# Altium PCB PCB1.PcbDoc
Units mm, origin at the board's own origin, x right, y up, seen from the top; angles counter-clockwise.
Board outline 58.29 x 42.93 mm, 2 copper layers (Top Layer, Bottom Layer); 28 components, 25 nets, 118 pads, 19 vias.
Unrouted connection lines stored in the file: 1.
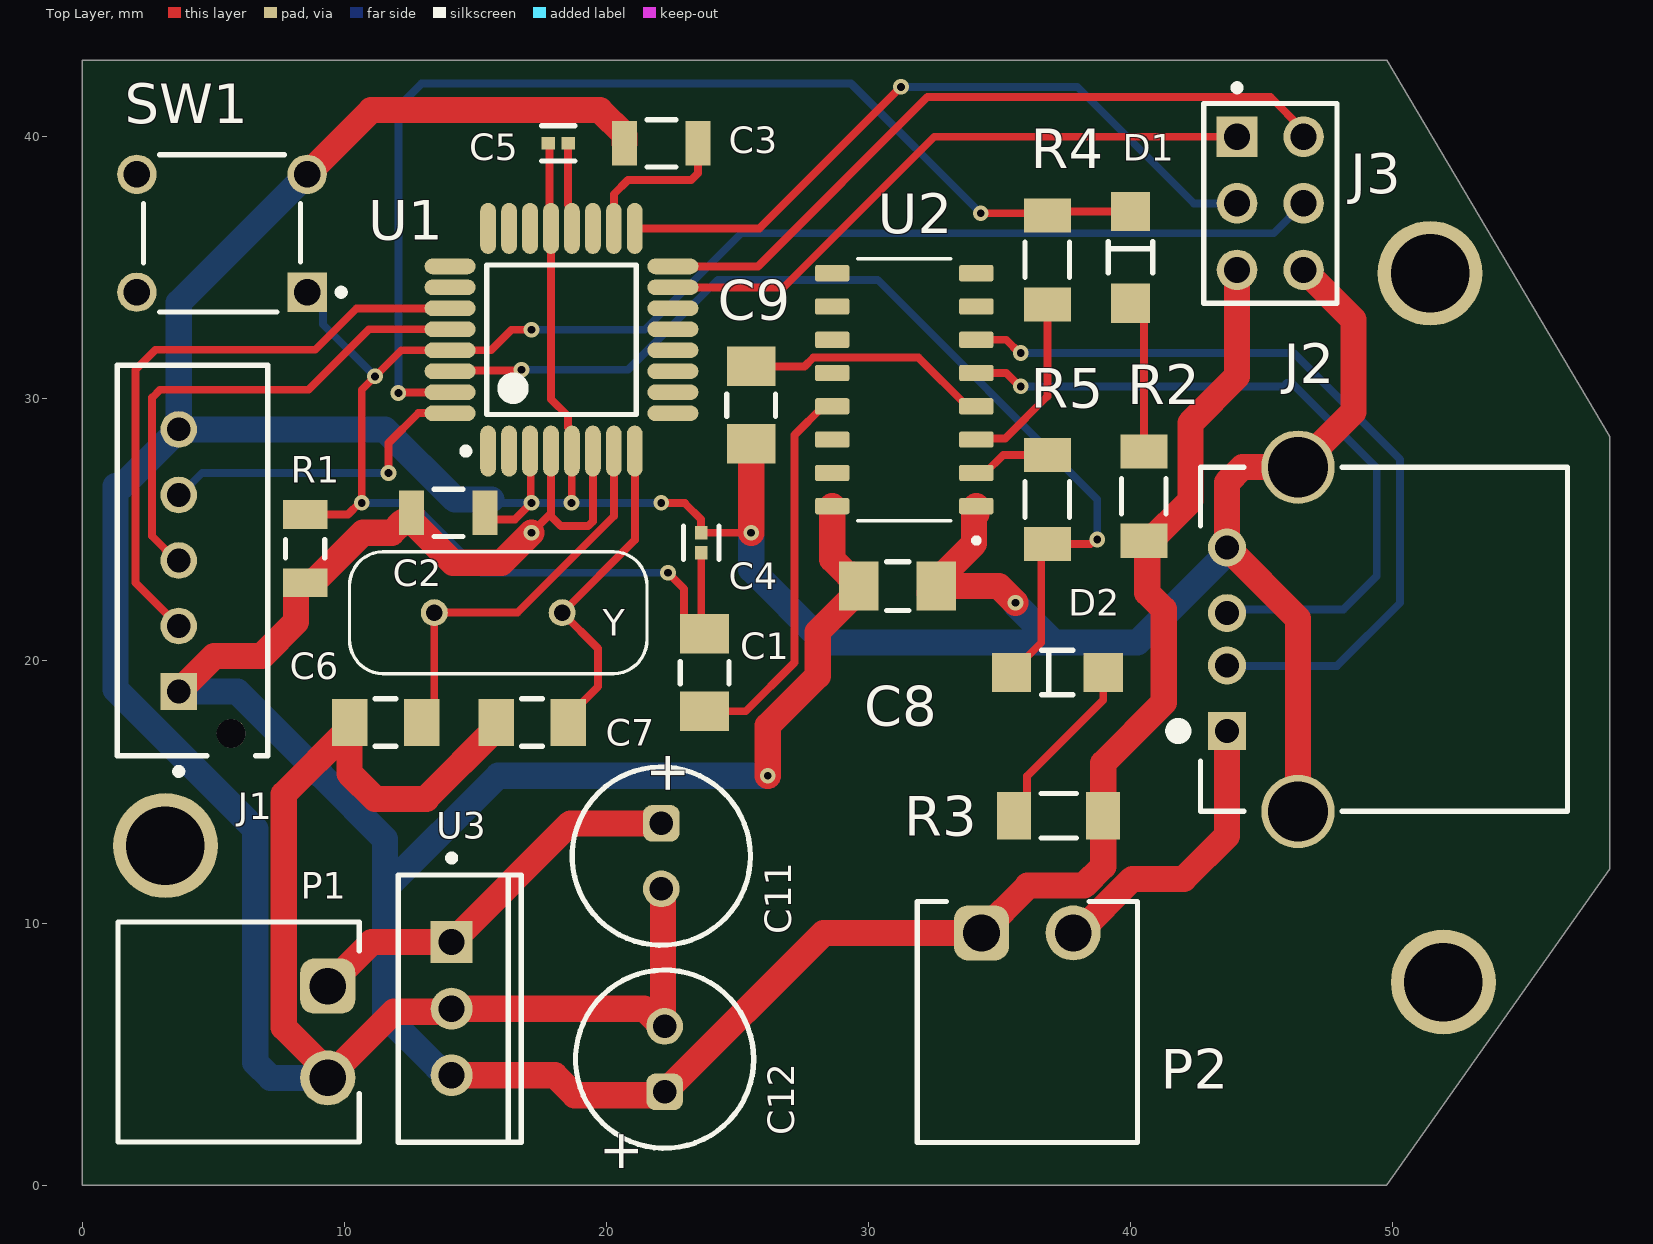
[diagram p0: Top Layer view]
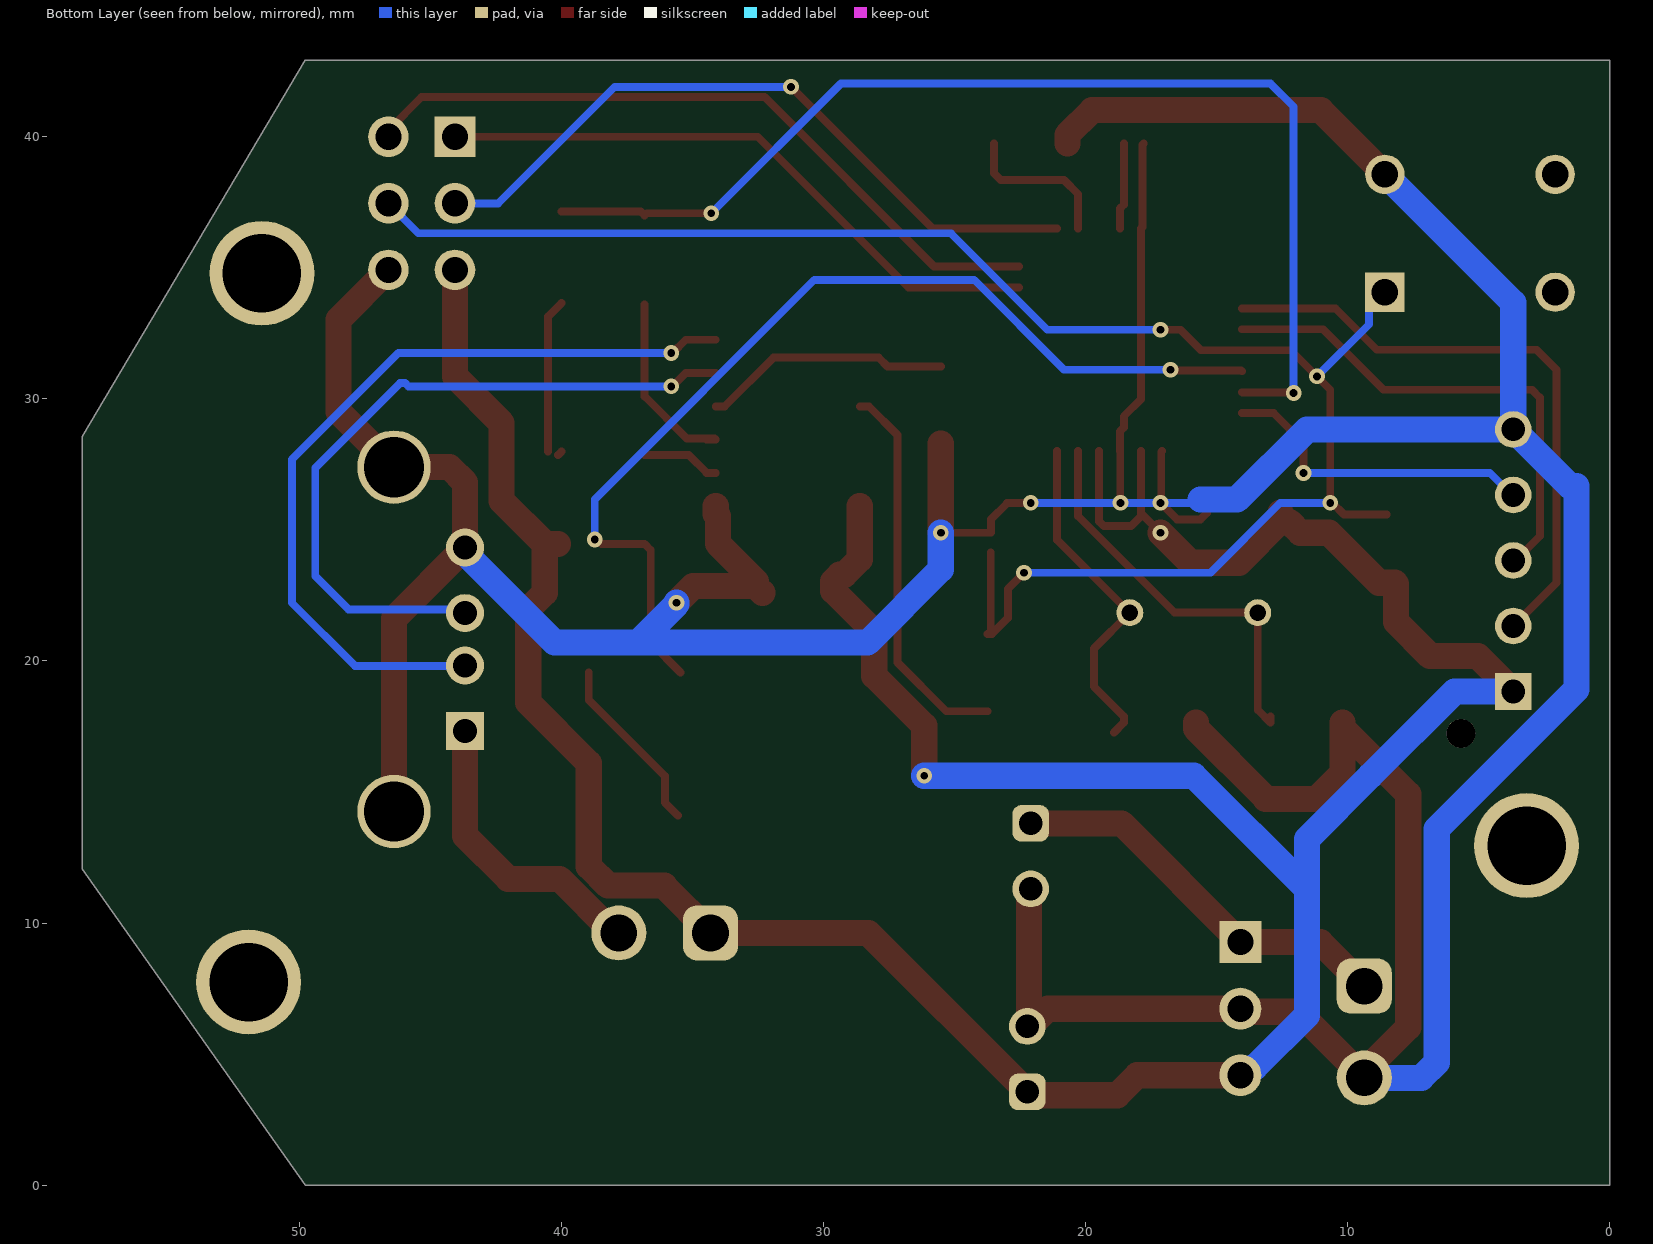
[diagram p1: Bottom Layer view, seen from below]
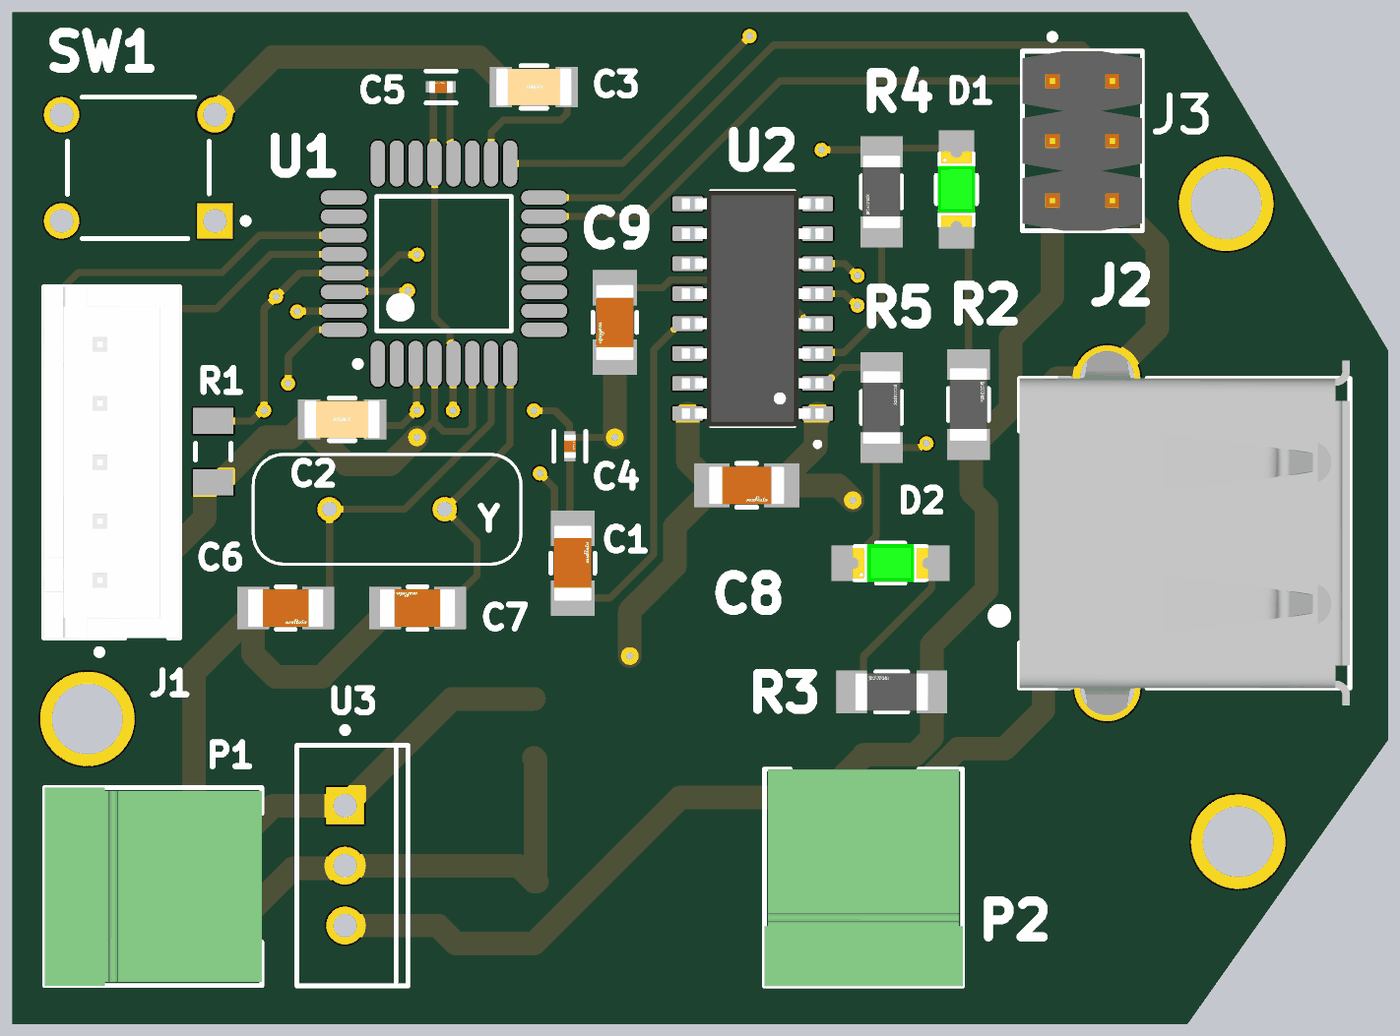
[diagram p2: 3D render of the assembled board from above, using the file's embedded part models]

## Layer stack, top to bottom
Top Solder: solder mask 0.0102, Solder Resist, Dk 3.5
Top Layer: signal copper 0.0356
Dielectric 1: dielectric 0.32, FR-4, Dk 4.8
Bottom Layer: signal copper 0.0356
Bottom Solder: solder mask 0.0102, Solder Resist, Dk 3.5

## Board outline
0,0 49.784,0 58.293,12.065 58.293,28.575 49.784,42.926 0,42.926

## Design rules (kind name [scope] priority, off if disabled: settings)
BoardOutlineClearance [All] p1: gap=0.2 ignorepadtopadclearanceinfootprint=FALSE
Clearance [All] p1: gap=0.127 ignorepadtopadclearanceinfootprint=FALSE except(0.25: Arc-Hole Track-Hole SMDPad-Hole THPad-Hole Via-Hole Fill-Hole Poly-Hole Region-Hole Text-Hole)
ComponentClearance [All] p1: gap=0.127 collisioncheckmode=3 verticalgap=0.127 showdistances=TRUE
DiffPairsRouting [All] p1: maxlimit=0.254 minlimit=0.127 mostfreqgap=0.127 toplayer_minwidth=0.127 toplayer_maxwidth=25.4 toplayer_prefwidth=0.127 bottomlayer_minwidth=0.127 bottomlayer_maxwidth=25.4 bottomlayer_prefwidth=0.127 maxuncoupledlength=12.7
Height [All] p1: minheight=0 maxheight=1816.048 prefheight=12.7
HoleSize [All] p1: absolutevalues=TRUE maxlimit=6.3 minlimit=0.3 maxpercent=80.000 minpercent=20.000
HoleToHoleClearance [All] p1: gap=0.25 allowstackedmicrovias=FALSE
MinimumAnnularRing [All] p1: minimumring=0.076
MinimumSolderMaskSliver [All] p1: minsoldermaskwidth=0
PlaneClearance [All] p1: clearance=0.127
PlaneConnect PlaneConnectPowerPads [InPadClass('PowerPads')] p1: planeconnectstyle=Direct reliefexpansion=0.508 reliefentries=4 reliefconductorwidth=0.254 reliefairgap=0.254
PlaneConnect [All] p2: pad.planeconnectstyle=Relief pad.reliefexpansion=0.3 pad.reliefentries=4 pad.reliefconductorwidth=0.127 pad.reliefairgap=0.127 via.planeconnectstyle=Direct via.reliefexpansion=0.3 via.reliefentries=4 via.reliefconductorwidth=0.127 via.reliefairgap=0.127
PolygonConnect PolygonConnectPowerPads [All vs (InPadClass('PowerPads'))] p1: connectstyle=Direct reliefconductorwidth=0.254 reliefentries=4 polygonreliefangle="90 Angle" airgapwidth=0.254
PolygonConnect [All] p2: thpad.connectstyle=Relief thpad.reliefconductorwidth=0.127 thpad.reliefentries=4 thpad.polygonreliefangle="90 Angle" thpad.airgapwidth=0.127 smdpad.connectstyle=Relief smdpad.reliefconductorwidth=0.127 smdpad.reliefentries=4 smdpad.polygonreliefangle="90 Angle" smdpad.airgapwidth=0.127 via.connectstyle=Direct via.reliefconductorwidth=0.127 via.reliefentries=4 via.polygonreliefangle="90 Angle" via.airgapwidth=0.127
RoutingVias [All] p1: holewidth=0.3 width=0.6 viastyle="Through Hole" minholewidth=0.3 minwidth=0.6 maxholewidth=0.6 maxwidth=6.6
SilkToSilkClearance [All] p1: silktosilkclearance=0
SilkToSolderMaskClearance [IsPad] p1: minsilkscreentomaskgap=0.127 clearancetoexposedcopper=TRUE
SolderMaskExpansion [All] p1: expansion=0.075 istentingtop=FALSE
Width [All] p1: maxlimit=1 minlimit=0.257 preferedwidth=0.3
20 further rules are at their usual default settings.

## Classes and differential pairs
component class "USB PORT": C8 C9 D1 D2 J2 P2 R2 R3 R4 R5 U2
component class "SENSOR INPUTS": J1
component class "POWER SUPPLY": C11 C12 P1 U3
component class MCU: C1 C2 C3 C4 C5 C6 C7 J3 R1 SW1 U1 Y

## Components (designator, comment, footprint, x,y, rotation, side; value= is the part's Value field where it differs from the comment)
C1 "GRM31M1X1H104JA01L" FP-GRM31M-0_15-IPC_A 23.749,19.558 r90 top
C2 "C1206C106K4PACTU" FP-C1206C106K4PACTU-MFG 13.97,25.654 r0 top
C3 "C1206C106K4PACTU" FP-C1206C106K4PACTU-MFG 22.098,39.751 r180 top
C4 "CL05B104KO5NNWC" FP-CL640-IPC_C 23.622,24.513 r90 top
C5 "CL05B104KO5NNWC" FP-CL640-IPC_C 18.163,39.751 r180 top
C6 "GRM31A7U3D220JW31D" FP-GRM31A-0_2-e0_3_0_8-IPC_B 11.578,17.653 r0 top value=22pF
C7 "GRM31A7U3D220JW31D" FP-GRM31A-0_2-e0_3_0_8-IPC_B 17.166,17.653 r180 top
C8 "GRM31M1X1H104JA01L" FP-GRM31M-0_15-IPC_A 31.115,22.86 r0 top
C9 "GRM31M1X1H104JA01L" FP-GRM31M-0_15-IPC_A 25.527,29.766 r270 top
C11 "870575873001" WCAP-HTG5_D6.3H8 -1247.902,1282.553 r90 top
C12 "870575873001" WCAP-HTG5_D6.3H8 1292.225,-1265.194 r270 top
D1 "HSMG-C150" FP-HSMG-C150-MFG 40.005,35.405 r270 top
D2 "HSMG-C150" FP-HSMG-C150-MFG 37.211,19.558 r0 top
J1 "B5B-XH-AM(LF)(SN)" FP-B5B-XH-AM_LF_SN-MFG 4.208,23.836 r270 top
J2 "292303-1" TE-292303-1_V 44.831,20.828 r90 top
J3 "90131-0763" FP-90131-0763-MFG 45.339,37.465 r270 top
P1 "240 V" 691322110002 5.969,5.842 r270 top
P2 "5 V" 691322110002 36.068,6.223 r0 top
R1 "ERA8AEB103V" RESC3216X70X50LL20T25 8.509,24.287 r270 top value="10 K"
R2 "CHP1206AFX-1001ELF" FP-CHP1206A-MFG 40.513,26.289 r270 top value="1 K"
R3 "CHP1206AFX-1001ELF" FP-CHP1206A-MFG 37.26,14.097 r0 top value="1 K"
R4 "CHP1206AFX-1001ELF" FP-CHP1206A-MFG 36.83,35.306 r90 top value="1 K"
R5 "CHP1206AFX-1001ELF" FP-CHP1206A-MFG 36.83,26.162 r270 top value="1 K"
SW1 "B3F-1000" OMRON-B3F-1000-4_V 5.334,36.322 r180 top
U1 "ATmega328P-AU" 32A_M 18.288,32.258 r90 top
U2 "CH340C" SOIC127P600X180-16N 31.369,30.353 r180 top
U3 "LM7805CT" FAIR-TO-220-3 14.097,6.731 r0 top
Y "ECS-160-S-4" XTAL_ECS-160-20-4X 15.875,21.844 r180 top

## Footprints (in the part's own frame and the unit in brackets; to place one, negate y for a bottom-side part, rotate by r counter-clockwise, add the part's x,y. Pads: shape width x height; smd on the part's side, far side on the other; paste and mask are expansions set on the pad)
32A_M [mm] "Thin QFP, 32-Leads, Body 7x7mm, Pitch 0.8mm, IPC Low Density"
  oval 1.95x0.6 smd: 1(-4.25,2.8) 2(-4.25,2) 3(-4.25,1.2) 4(-4.25,0.4) 5(-4.25,-0.4) 6(-4.25,-1.2) 7(-4.25,-2) 8(-4.25,-2.8) 17(4.25,-2.8) 18(4.25,-2) 19(4.25,-1.2) 20(4.25,-0.4) 21(4.25,0.4) 22(4.25,1.2) 23(4.25,2) 24(4.25,2.8)
  oval 0.6x1.95 smd: 9(-2.8,-4.25) 10(-2,-4.25) 11(-1.2,-4.25) 12(-0.4,-4.25) 13(0.4,-4.25) 14(1.2,-4.25) 15(2,-4.25) 16(2.8,-4.25) 25(2.8,4.25) 26(2,4.25) 27(1.2,4.25) 28(0.4,4.25) 29(-0.4,4.25) 30(-1.2,4.25) 31(-2,4.25) 32(-2.8,4.25)
  silkscreen extent -4.37,-2.85 2.85,3.77, body extent -3.5,-3.5 3.5,3.5, height 1.2
691322110002 [mm] "Horizontal PCB Header, pitch 3.5mm, 02p"
  rrect50% 2.1x2.1 hole 1.4: 1(-1.75,3.4)
  round 2.1 hole 1.4: 2(1.75,3.4)
  silkscreen extent -4.2,-4.6 4.2,4.6, body extent -4.2,-4.6 4.2,4.6, height 7.3
FAIR-TO-220-3 [mm] "FM, 3-Leads, Body 10.2x4.7mm, Pitch 2.54mm"
  rect 1.6x1.6 hole 1: 1(0,2.54)
  round 1.6 hole 1: 2(0,0) 3(0,-2.54)
  silkscreen extent -2.04,-5.1 2.66,5.87, body extent -2.04,-5.1 2.66,5.1, height 18.95
FP-90131-0763-MFG [mm]
  rect 1.55x1.55 hole 1 paste-2539.97 mask+0: 1(-2.54,-1.27)
  round 1.55 hole 1 paste-2539.97 mask+0: 2(-2.54,1.27) 3(0,-1.27) 4(0,1.27) 5(2.54,-1.27) 6(2.54,1.27)
  silkscreen extent -4.53,-2.54 3.81,2.54, body extent -3.91,-2.64 3.91,2.64, height 0.25
FP-B5B-XH-AM_LF_SN-MFG [mm]
  rect 1.4x1.4 hole 0.9 paste-2539.97 mask+0: 1(5,-0.525)
  round 1.4 hole 0.9 paste-2539.97 mask+0: 2(2.5,-0.525) 3(0,-0.525) 4(-2.5,-0.525) 5(-5,-0.525)
  round 1.1 hole 1.1 unplated paste-2539.97 mask+0: ""(6.6,1.475)
  silkscreen extent -7.45,-2.88 8.17,2.87, body extent -7.55,-2.98 7.55,2.98, height 0.25
FP-C1206C106K4PACTU-MFG [mm]
  rect 0.95x1.7 smd paste+0 mask+0: 1(-1.4,0) 2(1.4,0)
  silkscreen extent -0.55,-0.9 0.55,0.9, body extent -2,-1 2,1, height 0.25
FP-CHP1206A-MFG [mm]
  rect 1.3x1.8 smd paste+0 mask+0: 1(-1.7,0) 2(1.7,0)
  silkscreen extent -0.67,-0.85 0.67,0.85, body extent -2.45,-1 2.45,1, height 0.25
FP-CL640-IPC_C [mm]
  rect 0.515x0.472 smd paste+0 mask+0: 1(-0.379,0) 2(0.379,0)
  silkscreen extent -0.64,-0.67 0.64,0.67, body extent -0.74,-0.38 0.74,0.38, height 0.25
FP-GRM31A-0_2-e0_3_0_8-IPC_B [mm]
  rect 1.355x1.806 smd paste+0 mask+0: 1(-1.376,0) 2(1.376,0)
  silkscreen extent -0.4,-0.9 0.4,0.9, body extent -2.3,-1.15 2.3,1.15, height 0.25
FP-GRM31M-0_15-IPC_A [mm]
  rect 1.506x1.858 smd paste+0 mask+0: 1(-1.476,0) 2(1.476,0)
  silkscreen extent -0.42,-0.93 0.42,0.93, body extent -2.73,-1.43 2.73,1.43, height 0.25
FP-HSMG-C150-MFG [mm]
  rect 1.5x1.5 smd paste+0 mask+0: 1(-1.75,0) 2(1.75,0)
  silkscreen extent -0.6,-0.85 0.6,0.85, body extent -2.6,-0.95 2.6,0.95, height 0.25
OMRON-B3F-1000-4_V [mm] "TH, 4-Leads, Body 6x6mm"
  rect 1.5x1.5 hole 1 paste-2539.97: 1(-3.25,2.25)
  round 1.5 hole 1 paste-2539.97: 2(3.25,2.25) 4(3.25,-2.25)
  round 1.5 hole 1 paste-2539.97 mask+0.102: 3(-3.25,-2.25)
  silkscreen extent -4.68,-3 3,3, body extent -3.4,-3 3.4,3, height 4.5
RESC3216X70X50LL20T25 [mm] "Chip Resistor, 2-Leads, Body 3.20x1.60mm, IPC High Density"
  rect 1.1x1.7 smd: 1(-1.3,0) 2(1.3,0)
  silkscreen extent -0.35,-0.75 0.35,0.75, body extent -1.7,-0.9 1.7,0.9, height 0.7
SOIC127P600X180-16N [mm]
  rrect25% 1.31x0.62 smd: 1(-2.75,4.445) 2(-2.75,3.175) 3(-2.75,1.905) 4(-2.75,0.635) 5(-2.75,-0.635) 6(-2.75,-1.905) 7(-2.75,-3.175) 8(-2.75,-4.445) 9(2.75,-4.445) 10(2.75,-3.175) 11(2.75,-1.905) 12(2.75,-0.635) 13(2.75,0.635) 14(2.75,1.905) 15(2.75,3.175) 16(2.75,4.445)
  silkscreen extent -2.85,-5 1.78,5.85, body extent -3,-5 3,5, height 1.8
TE-292303-1_V [mm] "THD, 4-Leads, Body 13.13x14mm, Pitch 2.5mm"
  rect 1.45x1.45 hole 0.92: 1(-3.5,1.144)
  round 1.45 hole 0.92: 2(-1,1.144) 3(1,1.144) 4(3.5,1.144)
  round 2.8 hole 2.3: 5(-6.57,-1.566) 6(6.57,-1.566)
  silkscreen extent -6.56,-11.85 6.56,3.25, body extent -8.12,-11.85 8.12,2.15, height 7.72
WCAP-HTG5_D6.3H8 [mm] "Aluminum Hybrid Polymer Capacitor, diameter 6.30 mm"
  rrect50% 1.4x1.4 hole 0.9: 1(-1268.75,-1270)
  round 1.4 hole 0.9: 2(-1271.25,-1270)
  silkscreen extent -1273.4,-1273.4 -1266.6,-1266.6, body extent -1273.15,-1273.14 -1266.85,-1266.86, height 8.09
XTAL_ECS-160-20-4X [mm]
  round 1.03 hole 0.63: 1(-2.44,0) 2(2.44,0)
  silkscreen extent -5.68,-2.33 5.68,2.33

## Part data
C1 C8 C9: library part CMP-06035-007547-1, "Chip Multilayer Ceramic Capacitors for General Purpose, 1206, 0.10uF, SL, +350/-1000ppm/°C, 5%, 50V", Capacitance=0.1uF, Case Code (Imperial)=1206, Case Code (Metric)=3216, Dielectric Material=Ceramic, Max Operating Temperature=125°C, Min Operating Temperature=-55°C, Temperature Coefficient=-1000ppm/°C, Tolerance=5%, Voltage=50V, Case/Package=1206, Depth=1.6mm, Dissipation Factor=0.025%, Height=1.15mm, Length=0.126inch, Mount="Surface Mount", Packaging="Tape and Reel", Termination=SMD/SMT, Thickness=0.049inch, Voltage Rating=50V, Voltage Rating (DC)=50V, Width=0.063inch
C2 C3: library part CMP-03020-034688-1, "CAP CER 10UF 16V X5R 1206", Capacitance=10uF, Case/Package=1206, Dielectric=X5R, Dielectric Material=Ceramic, Max Operating Temperature=85°C, Min Operating Temperature=-55°C, Tolerance=10%, Voltage=16V, Construction=Flat, Depth=1.6mm, Height=1.6mm, Lead Free="Lead Free", Length=3.2mm, Mount="Surface Mount", Packaging="Tape and Reel", Radiation Hardening=No, RoHS Compliant=Yes, Termination=SMD/SMT, Voltage Rating (DC)=16V
C4 C5: library part CMP-13271-001008-1, "Cap Ceramic 100nF 16V X7R ±10% SMD 0402 +125°C Paper T/R", Capacitance=100nF, Case Code (Imperial)=0402, Case Code (Metric)=1005, Dielectric=X7R, Max Operating Temperature=125°C, Min Operating Temperature=-55°C, Package Quantity=1, Tolerance=10%, Voltage Rating=16V, Case/Package=0402, Contact Plating=Tin, Length=0.039inch, Mount="Surface Mount", Packaging="Cut Tape", Termination=Wraparound, Thickness=0.022inch, Width=0.02inch
C6 C7: library part CMP-06035-015250-1, "Chip Multilayer Ceramic Capacitors for General Purpose, 1206, 22pF, U2J, -750ppm/°C, 5%, 2kV", Capacitance=22pF, Case Code (Imperial)=1206, Case Code (Metric)=3216, Dielectric=U2J, Max Operating Temperature=125°C, Min Operating Temperature=-55°C, Package Quantity=4000, Tolerance=5%, Voltage Rating=2kV, Case/Package=1206, Depth=1.6mm, Height=1mm, Length=3.2mm, Material=Ceramic, Mount="Surface Mount", Packaging="Tape and Reel", Radiation Hardening=No, Termination=SMD/SMT, Thickness=0.039inch, Voltage Rating (DC)=2kV, Weight=0.000571oz, Width=1.6mm
C11 C12: library part CMP-03913-134709123-1, "870575873001 Cap, 10Uf, 63V, Alu Elec, Hybrid, Rad Rohs Compliant: Yes", Capacitance=10µF, ESR (Equivalent Series Resistance)=100mΩ, Leakage Current=6.3µA, Max Operating Temperature=105°C, Min Operating Temperature=-55°C, Ripple Current=1.06A, Voltage Rating=63V, Diameter=6.3mm, Hole Diameter=900µm, Length=8mm, NexarPartId=134709123, Pitch=2.5mm, RoHS=Compliant
D1: library part CMP-2000-05061-2, "LED GREEN DIFFUSED 1206 SMD", Color="Red LED", Colour=Green, Forward Current=20mA, Forward Voltage=2.2V, Manufacturer=Broadcom, Max Junction Temp=+95°C, Power Dissipation=65mW, Reverse Voltage=5V, Temperature="-40°C to +85°C", Temperature Range High=+85°C, Temperature Range Low=-40°C, Automotive=No, Category=Diode, ComponentLink2Description=Datasheet, ComponentLink2URL=https://docs.broadcom.com/docs/AV02-0551EN, Device Class L1=Optoelectronics, Device Class L2=LEDs, Device Class L3=unset, Digikey Description="LED GREEN DIFFUSED 1206 SMD", Height=1.2mm, Ipc Land Pattern Name=DIOCP320160X55, Lead Free=Yes, Led Orientation="Top View", Luminous Intensity=15mcd, Manufacturer Part Number=HSMG-C150, Mouser Description="LED Uni-Color Green 570nm 2-Pin Chip LED T/R", Octopart=https://octopart.com/hsmg-c150-broadcom-71131304, Package=HSMG-C150, Peak Emmision Wavelength=570nm, RoHS=TRUE, Viewing Angle=170°, Wavelength=572nm
D2: library part CMP-2000-05061-2, "LED GREEN DIFFUSED 1206 SMD", Color="Grenn LED", Colour=Green, Forward Current=20mA, Forward Voltage=2.2V, Manufacturer=Broadcom, Max Junction Temp=+95°C, Power Dissipation=65mW, Reverse Voltage=5V, Temperature="-40°C to +85°C", Temperature Range High=+85°C, Temperature Range Low=-40°C, Automotive=No, Category=Diode, ComponentLink2Description=Datasheet, ComponentLink2URL=https://docs.broadcom.com/docs/AV02-0551EN, Device Class L1=Optoelectronics, Device Class L2=LEDs, Device Class L3=unset, Digikey Description="LED GREEN DIFFUSED 1206 SMD", Height=1.2mm, Ipc Land Pattern Name=DIOCP320160X55, Lead Free=Yes, Led Orientation="Top View", Luminous Intensity=15mcd, Manufacturer Part Number=HSMG-C150, Mouser Description="LED Uni-Color Green 570nm 2-Pin Chip LED T/R", Octopart=https://octopart.com/hsmg-c150-broadcom-71131304, Package=HSMG-C150, Peak Emmision Wavelength=570nm, RoHS=TRUE, Viewing Angle=170°, Wavelength=572nm
J1: library part CMP-17439-000304-1, "CONN HEADER VERT 5POS 2.5MM", Color=Green, Contact Resistance=20mR, Flammability Rating="UL94 V-0", Housing Color=White, Insulation Color=Natural, Max Current Rating=3A, Max Operating Temperature=85°C, Max Voltage Rating (AC)=250V, Min Operating Temperature=-25°C, Connector Type=Header, Contact Finish - Mating=TIN, Contact Material=Brass, Contact Plating=Copper, Contact Shape=Square, Contact Type="Male Pin", Depth=5.75mm, Fastening Type=Detent, Housing Material=Polyamide, Insulation Material=Nylon, Lead Free="Lead Free", Length=14.9mm, Mated Stacking Heights=9.8mm, Mount="Through Hole", Number of Positions=5, Number of Rows=1, Orientation=Straight, Packaging=Bulk, Pitch=2.5mm, Series=XH, Termination=Solder, Voltage Rating=250V
J2: library part CMP-2000-05404-1, "1 Port Right Angle Through Hole Mount Female Type A USB Connector, 4 Position, -55 to 85 degC, RoHS, Tube", Manufacturer="TE Connectivity", Package Description="4-Pin Through Hole Device, Body 14 x 13.13 mm, Pitch 2.5 mm", Connector Mounting=PCB, Connector Type=USBA, Contact Material=Copper, Contact Plating=Gold, Contact Termination Type=Solder, Datasheet URL=http://www.farnell.com/cad/1653030.pdf, Datasheet Version=Feb-12, Gender=Receptacle, Manufacturer URL=http://www.te.com/, No. of Contacts=4, Package Reference=292303-1, SVHC=NoSVHC(16-Jun-2014)
J3: library part CMP-00257-00655468-1, "90131-0763 Conn Unshrouded Header HDR 6 POS 2.54mm Solder ST Top Entry Thru-Hole C-Grid III™ Tray", Contact Resistance=20mΩ, Current Rating=3A, Housing Color=Black, Insulation Resistance=5GΩ, Manufacturer Lifecycle Status=ACTIVE, Max Operating Temperature=125°C, Min Operating Temperature=-55°C, Voltage Rating=350V, Contact Material=Brass, Contact Plating=Gold, Country of Origin=SG, Gender=Male, Height=9.65mm, Housing Material=Polyester, Lead Free="Lead Free", Lead Pitch=2.54mm, Lifecycle Status=Production, Material="Glass, Polyester", Mount="Through Hole", NexarPartId=655468, Number of Circuits=6, Number of Contacts=6, Number of Poles=6, Number of Positions=6, Number of Rows=2, Orientation=Vertical, Pitch=2.54mm, Plating=Tin, Radiation Hardening=No, REACH SVHC=Unknown, RoHS=Compliant, Schedule B=8536694040, Termination="Through Hole", Voltage Rating (AC)=350V, Voltage Rating (DC)=350V, Working Voltage=350V
P1 P2: library part CMP-1502-01791-3, Color=Green, Current=10A, Max Operating Temperature=105°C, Min Operating Temperature=-40°C, Voltage=300V, Contact Material=Brass, Current Rating=10A, Gender=Male, Height=7.4mm, Lead Free="Lead Free", Lead Pitch=3.5mm, Length=10.5mm, Mount="Through Hole", NexarPartId=18818346, Number of Contacts=2, Number of Levels=1, Number of Pins=2, Number of Positions Per Level=2, Number of Rows=1, Packaging=Box, Pitch=3.5052mm, REACH SVHC=Unknown, RoHS=Compliant, Termination=Solder, Voltage Rating=300V, Width=8.1mm
R1: library part CMP-2003-04407-1, Manufacturer=Panasonic, Part Number=ERA8AEB103V
R2 R3 R4 R5: library part CMP-07231-007505-1, "RESHIGHPOWERA 1206 1K 1% 3/4W TC"
SW1: library part CMP-011-00004-2, "Tactile Switch, SPST-NO, 0.05 A, 24 V, -25 to 70 degC, 4-Pin THD, RoHS, Bulk", Contact Current Rating=50mA, Manufacturer="Omron Electronic Components", Max Contact Resistance=100mohm, Max Operating Temperature=70°C, Max Voltage Rating (DC)=24V, Min Operating Temperature=-25°C, Operating Force=100gf, Package Description="4-Pin Through Hole Device, Body 6 x 6 mm", Package Quantity=1500, Resistance=0.1Ohm, Case/Package=B3F-1000, Contact Material=Gold, Contact Plating=Gold, Current Rating=50mA, Datasheet URL=http://www.omron.com/ecb/products/pdf/en-b3f.pdf, Datasheet Version=Jan-15, Manufacturer URL=http://www.omron.com/, Max Current Rating=50mA, Mounting Technology=TH, Package Reference=B3F-1000, Packaging=Bulk, Pins=4, RoHS Compliant=True, Throw Configuration=SPST, Voltage Rating=24V, Voltage Rating (DC)=24V
U1: library part CMP-0095-00269-2, "8-bit AVR Microcontroller, 32KB Flash, 1KB EEPROM, 2KB SRAM, 32-pin TQFP, Industrial Grade (-40°C to 85°C)", Code_JEDEC=MS-026-ABA, ComponentLink1Description="Manufacturer URL", ComponentLink1URL=http://www.atmel.com/, ComponentLink2Description="ATmega48A/48PA/88A/88PA/168A/168PA/328/328P Datasheet", ComponentLink2URL=http://www.atmel.com/dyn/resources/prod_documents/doc8271.pdf, ComponentLink3Description="ATmega48A/48PA/88A/88PA/168A/168PA/328/328P Summary", ComponentLink3URL=http://www.atmel.com/dyn/resources/prod_documents/8271S.pdf, DatasheetVersion="revD, May-2011", PackageDescription="32-Lead, 7x7x1.0 mm Body, 0.8mm Lead Pitch, Thin Profile Plastic Quad Flat Package (TQFP)", PackageReference=32A, PackageVersion="revC, Oct-2010", RevisionNote="DatasheetVersion & PackageVersion updated. URLs added."
U2: "USB to serial chip CH340", Package=None, Availability="Not in stock", Check_prices=https://www.snapeda.com/parts/CH340C/WCH/view-part/?ref=eda, MF=WCH, MP=CH340C, Price=None, SnapEDA_Link=https://www.snapeda.com/parts/CH340C/WCH/view-part/?ref=snap
U3: library part CMP-2000-04938-1, "Positive Voltage Regulator, 5 V, 1 A, -40 to 125 degC, 3-Pin TO-220, RoHS, Tube", Manufacturer=FairchildSemiconductor, Maximum Input Voltage=35V, Maximum Output Current=2.2(Typ)A, Maximum Quiescent Current=8mA, Operating Temperature=-40to125degC, Output Voltage=5V, Package=3TO-220AB, Package Description="3-Pin Through Hole Device, Body 10 x 4.5 mm, Pitch 2.54 mm", Package Reference=TO-220, Typical Dropout Voltage @ Current=2@1AV, Accuracy=±4%, Category=LinearRegulator, Datasheet URL=https://datasheet.ciiva.com/26904/lm7805ct-26904988.pdf, Datasheet Version=Aug-12, Line Regulation=100mV, Load Regulation=100mV, Manufacturer URL=https://www.fairchildsemi.com/, Mounting=ThroughHole, Number of Outputs=1, Output Type=Fixed, Package URL=https://www.fairchildsemi.com/package-drawings/TO/TO220B03.pdf, Packaging=Rail/Tube, Polarity=Positive, Rad Hard=No, Type=Linear
Y: "16MHz Â±30ppm Crystal Series 40 Ohms HC-49/US", Package="HC49/US ECS International", Availability=Unavailable, MF="ECS Inc.", MP=ECS-160-S-4, Price=None, SnapEDA_Link=https://www.snapeda.com/parts/ECS-160-S-4/ECS%20Inc./view-part/3657575/?ref=snap

## Free pads (board coordinates)
  round 4 hole 3: 1(51.435,34.798) 2(51.943,7.747) 3(3.175,12.954)

## Via types
v1: diameter 0.6, hole 0.3, Top Layer to Bottom Layer, 19 vias

## Nets (pads, with @x,y where several pads share a name; then routed paths per layer and width w, separated by ;. In a path a pad name is that pad's centre, name@x,y a point inside that pad or via, vN(x,y) a via of type N, cw(c..) or ccw(c..) an arc to the next point about the centre after c; other vN are vias at no path point)
"+5 V": C2.1 C8.1 C12.1 J1.1 J3.5 P2.1 R1.2 R2.2 R3.2 U1.4 U1.6 U2.16 U3.3 | length 130.6
  Top Layer w0.3: C2.1 C2.1@12.837,25.387 ; v1(17.145,24.892) 17.888,25.635 ; U1.4 17.888,25.635 ; U1.6 19.488,25.33 19.304,25.146 18.269,25.146 17.888,25.527 17.888,25.635
  Top Layer w1: J1.1 5.04,20.193 6.858,20.193 8.159,21.494 8.159,22.937 8.209,22.987 8.809,22.987 10.714,24.892 11.808,24.892 12.22,25.304 C2.1@12.545,25.304 ; C2.1 12.57,25.329 14.15,23.749 16.002,23.749 v1(17.145,24.892) ; U3.3 18.034,4.191 18.796,3.429 22.098,3.429 C12.1 28.292,9.623 P2.1 34.318,9.637 36.068,11.387 36.068,11.43 38.227,11.43 38.96,12.163 R3.2 38.96,16.1 41.275,18.415 41.275,21.971 40.64,22.606 R2.2@40.64,24.439 ; v1(26.162,15.621) 26.162,17.526 28.067,19.431 28.067,21.112 29.639,22.684 C8.1 29.639,23.036 29.386,23.289 29.21,23.289 28.619,23.88 U2.16 ; R2.2@40.132,24.462 40.636,24.462 42.291,26.117 42.291,29.083 44.069,30.861 J3.5
  Bottom Layer w1: J1.1 5.921,18.836 9.14,15.617 ; 9.144,15.621 9.14,15.617 ; U3.3 13.935,4.191 13.635,4.491 13.543,4.491 11.557,6.477 11.557,11.303 ; v1(26.162,15.621) 15.875,15.621 11.557,11.303 ; 9.14,15.617 11.557,13.201 11.557,11.303
DM: J2.2 U2.6 | length 31.1
  Top Layer w0.3: U2.6 35.261,32.258 35.769,31.75 v1(35.814,31.75)
  Bottom Layer w0.3: v1(35.814,31.75) 46.228,31.75 50.292,27.686 50.292,22.225 47.879,19.812 43.703,19.812 J2.2
DP: J2.3 U2.5 | length 27.3
  Top Layer w0.3: U2.5 35.261,30.988 35.769,30.48 v1(35.814,30.48)
  Bottom Layer w0.3: v1(35.814,30.48) 45.847,30.48 45.977,30.61 46.16,30.61 49.403,27.367 49.403,23.241 48.133,21.971 43.83,21.971 J2.3
GND: C2.2 C3.2 C4.2 C5.2 C6.1 C7.2 C8.2 C9.2 C11.2 C12.2 J1.5 J2.4 J2.5 J2.6 J3.6 P1.2 SW1.3 U1.3 U1.5 U1.21 U2.1 U3.2 | length 202.7
  Top Layer w0.3: C6.1@10.054,17.801 C6.1 ; C2.2 15.624,25.4 16.51,25.4 v1(17.145,26.035) 17.117,26.063 17.117,27.98 U1.3 ; C5.2 17.836,39.699 17.836,36.56 U1.21 17.888,29.991 18.542,29.337 18.542,28.91 18.688,28.764 U1.5 18.678,27.999 18.678,26.044 v1(18.669,26.035) ; v1(22.098,26.035) 22.109,26.024 22.998,26.024 23.611,25.411 23.611,24.903 C4.2 v1(25.527,24.892)
  Top Layer w1: SW1.3 11.033,41.021 19.753,41.021 20.698,40.076 C3.2 ; C6.1 C6.1@10.202,17.427 ; C7.2 15.79,17.427 13.13,14.767 13.13,14.732 11.176,14.732 10.202,15.706 C6.1@10.202,17.427 ; C11.2 22.162,11.239 22.162,6.12 C12.2 ; C12.2@22.117,6.056 21.442,6.731 U3.2 13.982,6.616 11.893,6.616 P1.2 9.369,4.344 7.692,6.021 7.692,14.917 C6.1@10.202,17.427 ; v1(25.527,24.892) C9.2 ; C8.2@32.338,22.607 C8.2@32.385,22.654 ; C8.2@32.591,23.036 34.036,24.481 34.036,25.527 34.119,25.61 U2.1 ; C8.2@32.615,22.836 C8.2 34.979,22.86 v1(35.614,22.225) ; J2.5 46.397,21.618 J2.4 43.687,26.812 44.273,27.398 J2.6 48.514,29.515 48.514,33.02 J3.6
  Bottom Layer w0.3: 15.621,26.162 15.748,26.035 v1(17.145,26.035) v1(18.669,26.035) v1(22.098,26.035)
  Bottom Layer w1: SW1.3 3.683,33.671 J1.5 ; P1.2 7.19,4.092 6.604,4.678 6.604,13.589 1.27,18.923 1.27,26.67 1.517,26.67 J1.5 ; 15.621,26.162 14.224,26.162 11.55,28.836 J1.5 ; v1(25.527,24.892) 25.527,23.495 28.321,20.701 37.084,20.701 ; v1(35.614,22.225) 35.614,22.171 37.084,20.701 ; J2.4 43.687,24.206 43.462,23.981 43.462,23.904 40.259,20.701 37.084,20.701
MISO: J3.2 U1.16 | length 27.5
  Top Layer w0.3: U1.16 25.787,35.058 32.258,41.529 45.339,41.529 46.609,40.259 J3.2
MOSI: J3.1 U1.15 | length 23.9
  Top Layer w0.3: U1.15 26.768,34.258 32.515,40.005 J3.1
NetC1_1: C1.1 U2.13 | length 14.8
  Top Layer w0.3: C1.1 25.321,18.082 27.178,19.939 27.178,28.622 28.274,29.718 U2.13
NetC3_1: C3.1 U1.18 | length 6
  Top Layer w0.3: U1.18 20.288,37.814 20.828,38.354 23.241,38.354 23.498,38.611 C3.1
NetC5_1: C5.1 U1.20 | length 3.3
  Top Layer w0.3: C5.1 18.542,37.41 18.688,37.264 U1.20
NetC6_2: C6.2 U1.7 Y.2 | length 15.5
  Top Layer w0.3: C6.2@12.954,17.879 C6.2 13.435,18.134 Y.2 16.606,21.844 20.288,25.526 U1.7
NetC7_1: C7.1 U1.8 Y.1 | length 13.1
  Top Layer w0.3: C7.1@18.923,17.272 C7.1 18.542,17.879 19.685,19.022 19.685,20.474 Y.1 21.088,24.617 U1.8
NetC9_1: C9.1 U2.4 | length 9.5
  Top Layer w0.3: C9.1 27.562,31.242 27.895,31.575 31.917,31.575 33.774,29.718 U2.4
NetC11_1: C11.1 P1.1 U3.1 | length 15.3
  Top Layer w1: P1.1 11.048,9.271 U3.1 18.629,13.803 C11.1
NetD1_1: D1.1 R4.2 U1.31 | length 43.4
  Top Layer w0.3: v1(12.065,30.226) 12.081,30.242 14.022,30.242 U1.31 ; v1(34.29,37.084) 36.752,37.084 R4.2 36.979,37.155 D1.1
  Bottom Layer w0.3: v1(12.065,30.226) 12.065,41.148 12.954,42.037 29.337,42.037 v1(34.29,37.084)
NetD1_2: D1.2 R2.1 | length 6.1
  Top Layer w0.3: R2.1@40.005,27.989 R2.1@40.132,27.862 ; D1.2 40.513,33.147 R2.1
NetD2_1: D2.1 R5.2 U1.30 | length 38.6
  Top Layer w0.3: U1.30 14.067,31.087 16.736,31.087 v1(16.764,31.115) ; D2.1 36.599,20.696 36.599,24.231 R5.2 38.478,24.462 38.654,24.638 v1(38.735,24.638)
  Bottom Layer w0.3: v1(16.764,31.115) 20.828,31.115 24.257,34.544 30.353,34.544 38.735,26.162 v1(38.735,24.638)
NetD2_2: D2.2 R3.1 | length 6.9
  Top Layer w0.3: R3.1 36.06,14.597 36.06,15.613 38.961,18.514 D2.2
NetJ1_2: J1.2 U1.27 | length 23.4
  Top Layer w0.3: J1.2 2.032,22.987 2.032,31.115 2.794,31.877 8.89,31.877 10.471,33.458 U1.27
NetJ1_3: J1.3 U1.28 | length 19.1
  Top Layer w0.3: J1.3 3.596,23.836 2.667,24.765 2.667,30.05 2.97,30.353 8.636,30.353 10.941,32.658 U1.28
NetJ1_4: J1.4 U1.32 | length 12.3
  Top Layer w0.3: v1(11.684,27.178) 11.684,28.321 12.821,29.458 U1.32
  Bottom Layer w0.3: J1.4 3.74,26.336 4.582,27.178 v1(11.684,27.178)
NetJ2_1: J2.1 P2.2 | length 11.4
  Top Layer w1: P2.2 38.014,9.623 40.075,11.684 42.037,11.684 43.687,13.334 J2.1
NetR4_1: R4.1 U2.3 | length 7.2
  Top Layer w0.3: U2.3@34.464,28.448 U2.3 34.164,28.493 35.224,28.493 36.83,30.099 R4.1
NetR5_1: R5.1 U2.2 | length 3
  Top Layer w0.3: U2.2 34.464,27.178 35.148,27.862 R5.1
RESET: C1.2 C4.1 J3.4 R1.1 SW1.1 U1.29 | length 68.6
  Top Layer w0.3: R1.1 10.139,25.587 10.587,26.035 v1(10.668,26.035) 10.668,30.353 12.173,31.858 U1.29 15.602,31.858 16.383,32.639 v1(17.145,32.639) ; v1(22.352,23.368) 22.97,22.75 22.97,21.637 23.573,21.034 C1.2 ; C1.2@23.622,21.161 C4.1
  Bottom Layer w0.3: SW1.1 9.184,33.472 9.184,32.853 v1(11.176,30.861) ; v1(10.668,26.035) 12.573,26.035 15.24,23.368 v1(22.352,23.368) ; v1(17.145,32.639) 21.463,32.639 25.146,36.322 45.466,36.322 J3.4
SCK: J3.3 U1.17 | length 27.1
  Top Layer w0.3: U1.17 25.84,36.508 v1(31.242,41.91)
  Bottom Layer w0.3: v1(31.242,41.91) 37.973,41.91 42.418,37.465 J3.3
pads on no net: J1. SW1.2 SW1.4 U1.1 U1.2 U1.9 U1.10 U1.11 U1.12 U1.13 U1.14 U1.19 U1.22 U1.23 U1.24 U1.25 U1.26 U2.7 U2.8 U2.9 U2.10 U2.11 U2.12 U2.14 U2.15

## Text inside footprints (layer, text, board x,y; h text height)
C11: Top Overlay "+" at 22.987,14.859 h1.5 r90
C12: Top Overlay "+" at 19.939,2.159 h1.5 r270